# Altium PCB 原理.PcbDoc
Units mil, origin at the board's own origin, x right, y up, seen from the top; angles counter-clockwise.
Board outline 4355 x 2700 mil, 2 copper layers (Top Layer, Bottom Layer); 19 components, 29 nets, 132 pads, 5 vias.
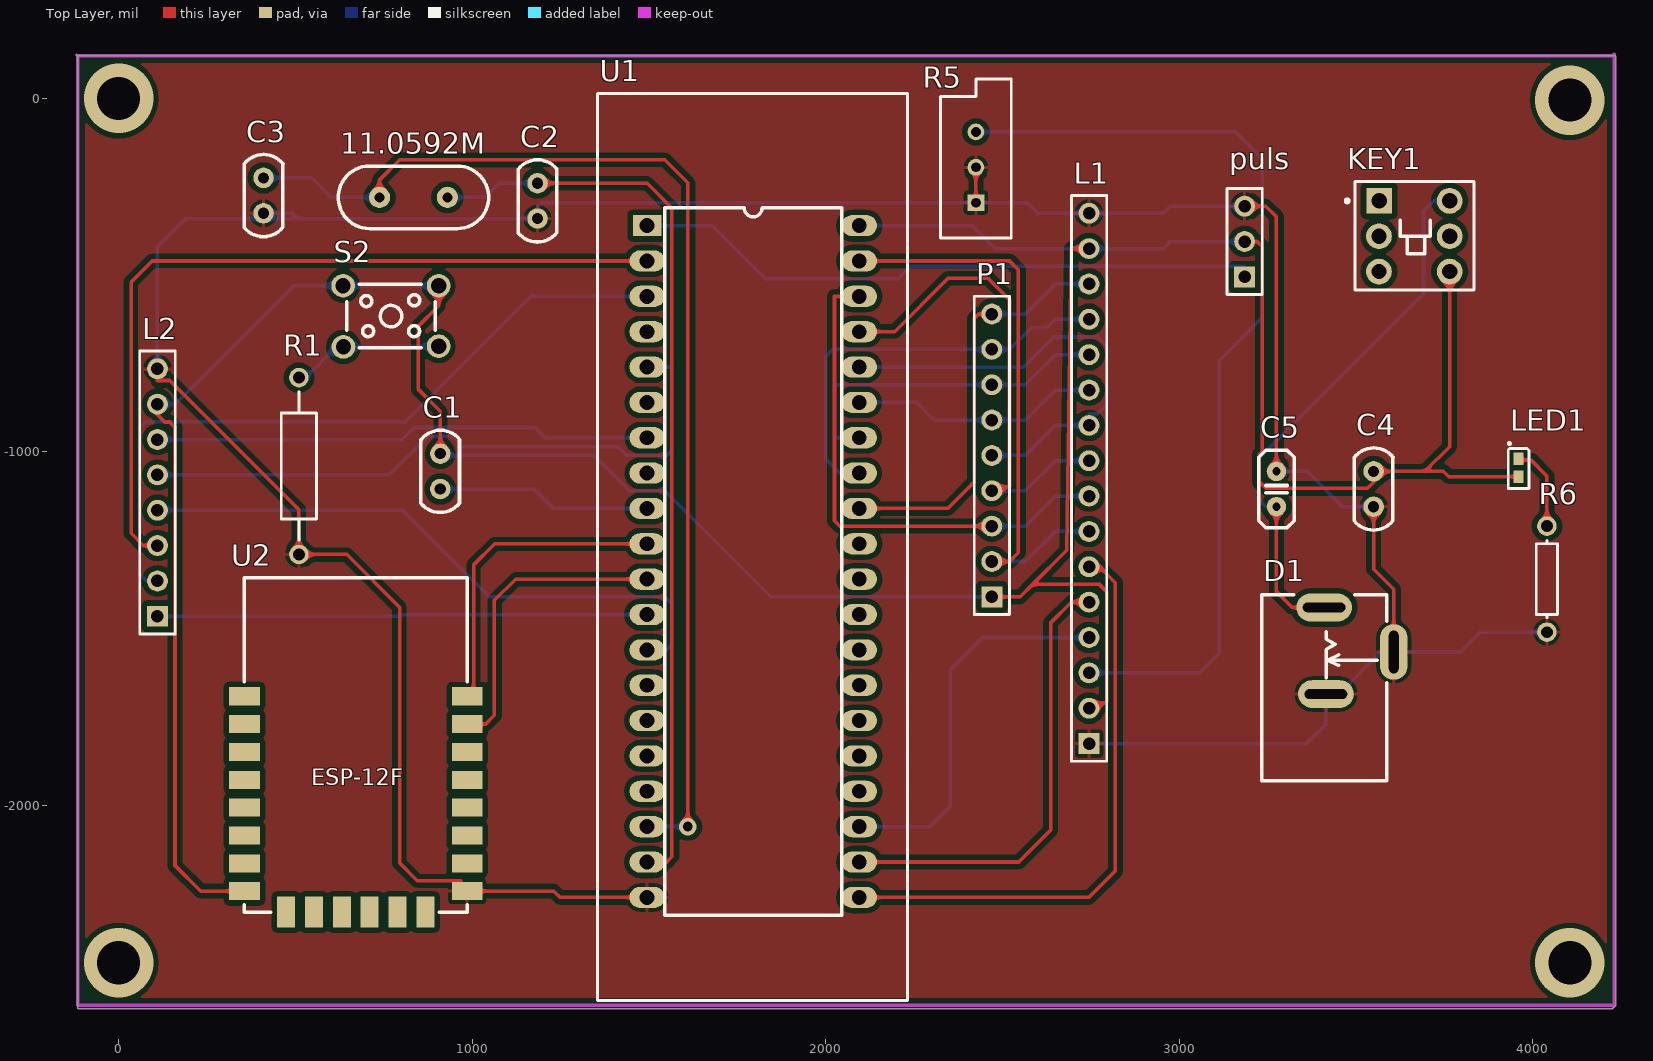
[diagram p0: Top Layer view]
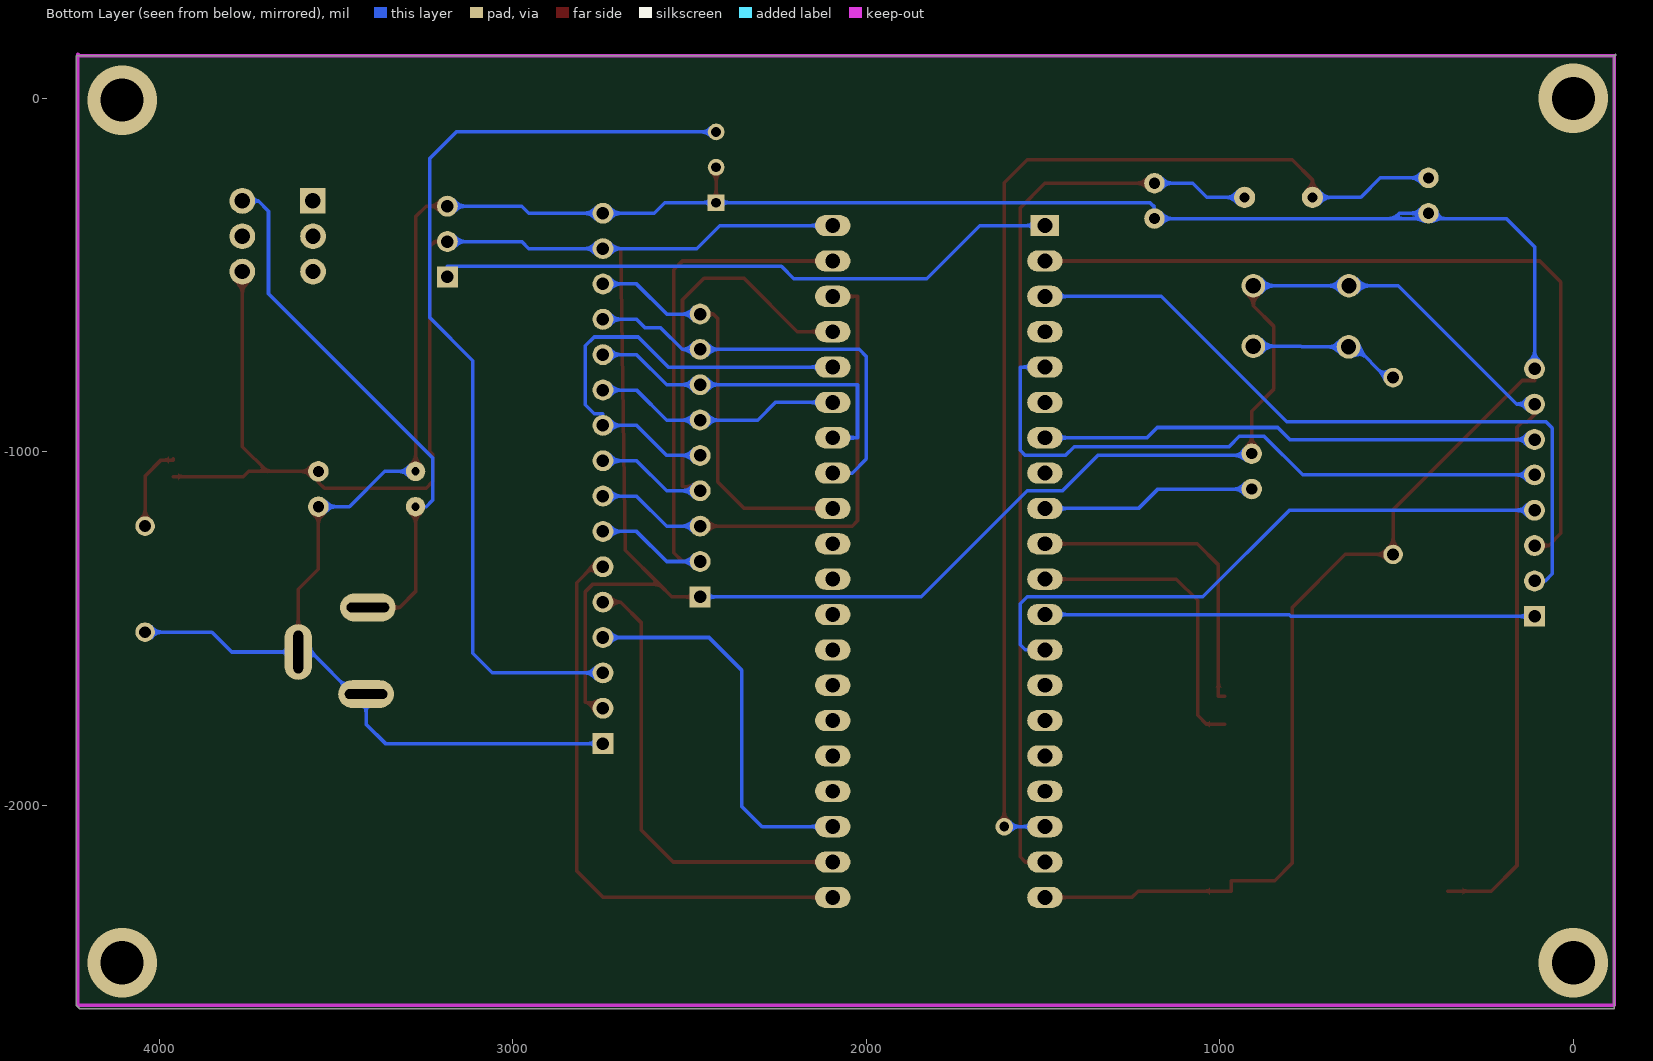
[diagram p1: Bottom Layer view, seen from below]
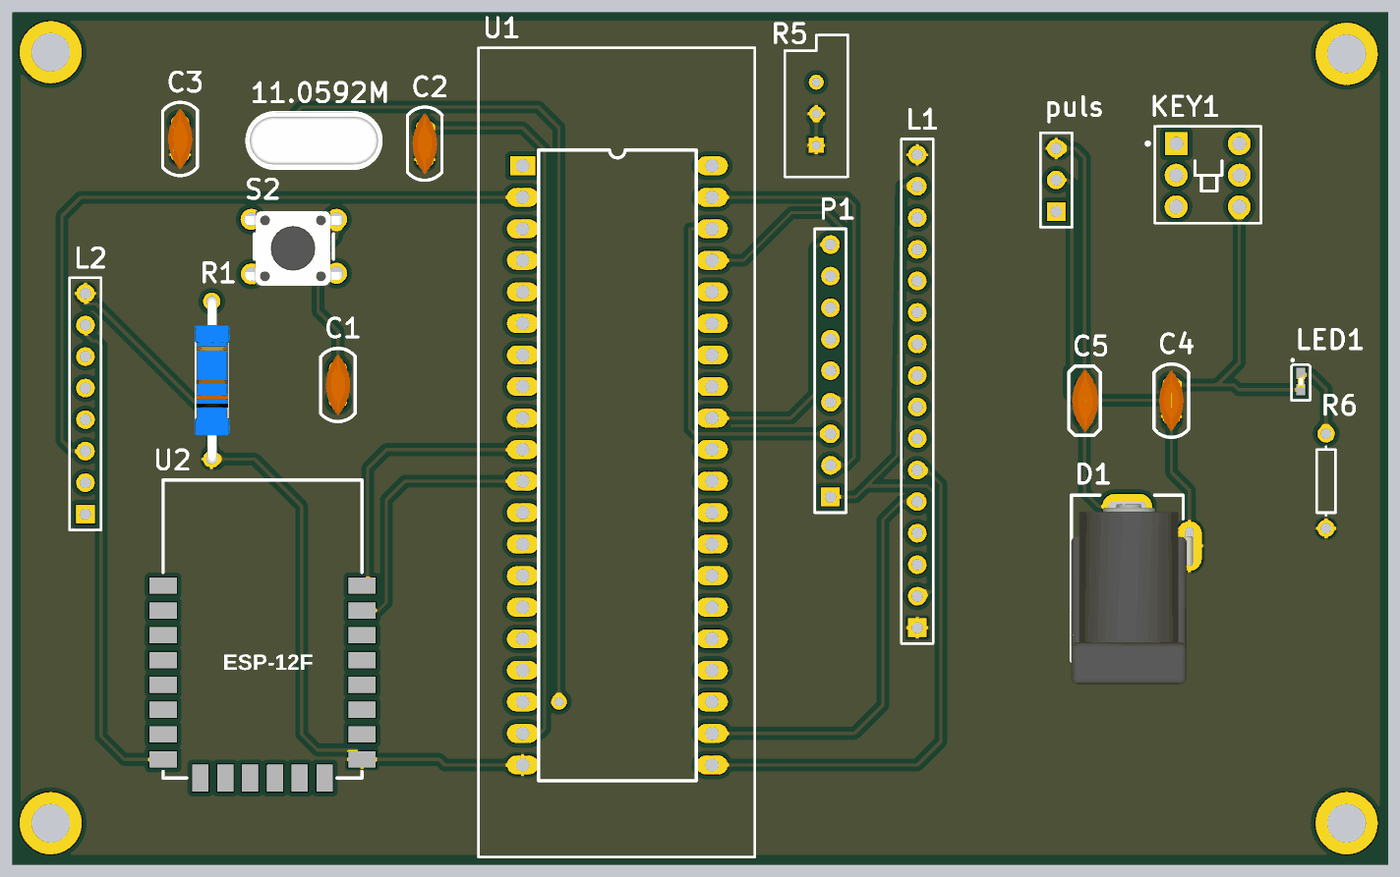
[diagram p2: 3D render of the assembled board from above, using the file's embedded part models]

## Layer stack, top to bottom
Top Solder: solder mask 0.4, Solder Resist, Dk 3.5
Top Layer: signal copper 1.4
Dielectric 1: dielectric 12.6, FR-4, Dk 4.8
Bottom Layer: signal copper 1.4
Bottom Solder: solder mask 0.4, Solder Resist, Dk 3.5

## Board outline
-120,120 4235,120 4235,-2565 4225,-2575 -115,-2575 -115,120 -120,125

## Design rules (kind name [scope] priority, off if disabled: settings)
Clearance [All] p1: gap=15 ignorepadtopadclearanceinfootprint=FALSE
PolygonConnect [All] p1: connectstyle=Relief reliefconductorwidth=10 reliefentries=4 polygonreliefangle="90 Angle" airgapwidth=10
RoutingVias [All] p1: holewidth=28 width=50 viastyle="Through Hole" minholewidth=28 minwidth=50 maxholewidth=28 maxwidth=50
SolderMaskExpansion [All] p1: expansion=4
Width [All] p1: maxlimit=20 minlimit=10 preferedwidth=10
30 further rules are at their usual default settings.

## Components (designator, comment, footprint, x,y, rotation, side; value= is the part's Value field where it differs from the comment)
11.0592M "晶振" XTAL-49/U_N 930,-280 r180 top
C1 "Cap" CAP-0.1 910,-1055 r90 top value=10uF
C2 "" CAP-0.1 1185,-290 r90 top value=30pf
C3 "" CAP-0.1 410,-275 r90 top value=30pF
C4 "Cap" CAP-0.1 3550,-1105 r90 top value=0.1uf/50v
C5 "Cap Pol2" Capacitor-Disk-Middle 3275,-1155 r90 top value=220uF/16V
D1 "Component_1" 接插件_DC端口 3410,-1440 r90 top
KEY1 "Component_2" sw_8.5mm 3565,-390 r0 top
L1 "LCD1602" HDR1X16 2745,-1825 r90 top
L2 "ST7735TFTLCD" HDR1X8 110,-1465 r90 top
LED1 "LED Chip" CLED1005-0402 3960,-1044.41 r90 top
P1 "A103-j" HDR1X9 2470,-1410 r90 top
puls "3.3v" HDR1X3 3185,-505 r90 top
R1 "Resistor 贴片" AXIAL-0.5-R 510,-1040 r90 top value=10k
R5 "RPot" VR5 2425,-195 r90 top value=1K
R6 "Res1" AXIAL-0.3 4040,-1360 r90 top value=510/0.125w
S2 "弹性小按键" BUTTON_6*6 905.37,-701 r180 top
U1 "STC12C5A60S2_DIP" "dip40 - 紧缩座" 1495,-360 r0 top
U2 "ESP-12F" ESP-12F 356,-2301.5 r0 top

## Footprints (in the part's own frame and the unit in brackets; to place one, negate y for a bottom-side part, rotate by r counter-clockwise, add the part's x,y. Pads: shape width x height; smd on the part's side, far side on the other; paste and mask are expansions set on the pad)
AXIAL-0.3 [mm] "Axial Device, Thru-Hole; 2 Leads; 0.3 in Pin Spacing"
  round 1.4 hole 0.85: 1(-3.81,0) 2(3.81,0)
  silkscreen extent -2.77,-0.76 2.77,0.76
AXIAL-0.5-R [mm] "1/2W/1W"
  round 1.4 hole 0.85: 1(-6.35,0) 2(6.35,0)
  silkscreen extent -5.33,-1.27 5.33,1.27, body extent -6.73,-1.46 6.73,1.4, height 3.1
BUTTON_6*6 [mm] "轻触按键"
  round 1.7 hole 1.1: 1(0,0) 1(6.842,0.051) 2(0,-4.343) 2(6.867,-4.343)
  silkscreen extent 0.25,-4.44 6.6,0.13, body extent -0.48,-5.01 7.49,0.99, height 5.26
CAP-0.1 [mil] "瓷片电容"
  round 58 hole 31.5: 1(-50,0) 2(50,0)
  silkscreen extent -116,-55 116,55, body extent -97,-39 97,39, height 226
Capacitor-Disk-Middle [mm]
  round 1.4 hole 0.6: 1(0,0) 2(2.54,0)
  silkscreen extent -1.52,-1.27 4.06,1.27, body extent -1.23,-1.1 3.77,1, height 7
CLED1005-0402 [mm]
  rect 0.9x0.7 smd: 1(-0.65,0) 2(0.65,0)
  silkscreen extent -1.5,-0.75 1.78,0.75, body extent -0.5,-0.25 0.5,0.25, height 0.4
"dip40 - 紧缩座" [mil]
  rect 80x60 hole 42: 1(0,0)
  oval 100x60 hole 42: 2(0,-100) 3(0,-200) 4(0,-300) 5(0,-400) 6(0,-500) 7(0,-600) 8(0,-700) 9(0,-800) 10(0,-900) 11(0,-1000) 12(0,-1100) 13(0,-1200) 14(0,-1300) 15(0,-1400) 16(0,-1500) 17(0,-1600) 18(0,-1700) 19(0,-1800) 20(0,-1900) 21(600,-1900) 22(600,-1800) 23(600,-1700) 24(600,-1600) 25(600,-1500) 26(600,-1400) 27(600,-1300) 28(600,-1200) 29(600,-1100) 30(600,-1000) 31(600,-900) 32(600,-800) 33(600,-700) 34(600,-600) 35(600,-500) 36(600,-400) 37(600,-300) 38(600,-200) 39(600,-100) 40(600,0)
  silkscreen extent -140,-2192 736,374
ESP-12F [mm] "贴片封装，16*24mm"
  rect 2.2x1.3 smd: 1(0,15.5) 2(0,13.5) 3(0,11.5) 4(0,9.5) 5(0,7.5) 6(0,5.5) 7(0,3.5) 8(0,1.5) 15(16.002,1.5) 16(16.002,3.5) 17(16.002,5.5) 18(16.002,7.5) 19(16.002,9.5) 20(16.002,11.5) 21(16.002,13.5) 22(16.002,15.5)
  rect 1.3x2.2 smd: 9(2.996,0) 10(4.996,0) 11(6.996,0) 12(8.996,0) 13(10.996,0) 14(12.996,0)
  silkscreen extent 0,0 16,24
HDR1X3 [mm] "Connector; Header; 3 Position"
  rect 1.5x1.5 hole 0.9: 1(0,0)
  round 1.5 hole 0.9: 2(2.54,0) 3(5.08,0)
  silkscreen extent -1.27,-1.27 6.35,1.27
HDR1X8 [mm] "Connector; Header; 8 Position"
  rect 1.5x1.5 hole 0.9: 1(0,0)
  round 1.5 hole 0.9: 2(2.54,0) 3(5.08,0) 4(7.62,0) 5(10.16,0) 6(12.7,0) 7(15.24,0) 8(17.78,0)
  silkscreen extent -1.27,-1.27 19.05,1.27
HDR1X9 [mm] "Connector; Header; 9 Position"
  rect 1.5x1.5 hole 0.9: 1(0,0)
  round 1.5 hole 0.9: 2(2.54,0) 3(5.08,0) 4(7.62,0) 5(10.16,0) 6(12.7,0) 7(15.24,0) 8(17.78,0) 9(20.32,0)
  silkscreen extent -1.27,-1.27 21.59,1.27
HDR1X16 [mm] "Connector; Header; 16 Position"
  rect 1.5x1.5 hole 0.9: 1(0,0)
  round 1.5 hole 0.9: 2(2.54,0) 3(5.08,0) 4(7.62,0) 5(10.16,0) 6(12.7,0) 7(15.24,0) 8(17.78,0) 9(20.32,0) 10(22.86,0) 11(25.4,0) 12(27.94,0) 13(30.48,0) 14(33.02,0) 15(35.56,0) 16(38.1,0)
  silkscreen extent -1.27,-1.27 39.37,1.27
sw_8.5mm [mm] "自锁开关"
  round 1.85 hole 1.1: 1(0,0) 2(0,-2.54) 4(5.08,0) 5(5.08,2.54) 6(5.08,-2.54)
  rect 1.85x1.85 hole 1.1: 3(0.016,2.544)
  silkscreen extent -2.4,-3.86 6.84,3.94, body extent -0.83,-3.49 6.17,3.51, height 12.5
VR5 [mm] "Thru-Hole; 3 Leads"
  rect 1.2x1.2 hole 0.7: 1(-2.54,0)
  round 1.2 hole 0.7: 2(0,0) 3(2.54,0)
  silkscreen extent -5.08,-2.54 6.35,2.54
XTAL-49/U_N [mil] "高型晶振（未加焊）"
  round 60 hole 28: 1(0,0) 2(192,0)
  silkscreen extent -116,-88 308,89, body extent -117,-88 309,89, height 512
接插件_DC端口 [mm]
  oval 2x4 hole 0.7 slot 3.048 at 90 deg: 1(0,0) 2(-6.223,-0.127)
  oval 4x2 hole 0.7 slot 3.048 at 0 deg: 3(-3.2,-5)
  silkscreen extent -12.45,-4.5 0.9,4.5, body extent -14.33,-5.28 0.17,4.52, height 11.25

## Part data
C1 C4: "Capacitor", LatestRevisionDate=17-Jul-2002, LatestRevisionNote="Re-released for DXP Platform.", PackageDescription="Radial Cap, Thru-Hole; 2 Leads; 0.3 in Pin Spacing", PackageReference=RAD-0.3, Published=8-Jun-2000, Publisher="Altium Limited"
C2 C3: library part Cap, "Capacitor", LatestRevisionDate=17-Jul-2002, LatestRevisionNote="Re-released for DXP Platform.", PackageDescription="Radial Cap, Thru-Hole; 2 Leads; 0.3 in Pin Spacing", PackageReference=RAD-0.3, Published=8-Jun-2000, Publisher="Altium Limited"
C5: "Polarized Capacitor (Axial)", LatestRevisionDate=17-Jul-2002, LatestRevisionNote="Re-released for DXP Platform.", PackageDescription="Polarized Capacitor; 2 Leads", PackageReference=POLAR0.8, Published=8-Jun-2000, Publisher="Altium Limited"
KEY1: library part Component_1
L1: library part "Header 16", "Header, 16-Pin", LatestRevisionDate=17-Jul-2002, LatestRevisionNote="Re-released for DXP Platform.", Publisher="Altium Limited"
LED1: "Typical Chip LED", Published=8-Jun-2000, Publisher="Altium Limited", Revision="July-2002: Re-released for DXP Platform."
puls: library part puls
R5: "Potentiometer", LatestRevisionDate=17-Jul-2002, LatestRevisionNote="Re-released for DXP Platform.", PackageReference=VR5, Published=8-Jun-2000, Publisher="Altium Limited", Set Position=0.5, Sim Note="Enter the Resistance value and the set point into parameter fields."
R6: "Resistor", LatestRevisionDate=17-Jul-2002, LatestRevisionNote="Re-released for DXP Platform.", PackageDescription="Axial Device, Thru-Hole; 2 Leads; 0.3 in Pin Spacing", PackageReference=AXIAL-0.3, Published=8-Jun-2000, Publisher="Altium Limited"
U2: "wifi芯片，ESP8266串口WIFI", 购买参考链接=https://item.taobao.com/item.htm?spm=a1z10.3-c-s.w4002-16248799899.48.e2eb546eHCQD5R&id=45081050416

## Via types
v1: diameter 196.85, hole 122.05, Top Layer to Bottom Layer, 4 vias
v2: diameter 50, hole 28, Top Layer to Bottom Layer, 1 vias

## Nets (pads, with @x,y where several pads share a name; then routed paths per layer and width w, separated by ;. In a path a pad name is that pad's centre, name@x,y a point inside that pad or via, vN(x,y) a via of type N, cw(c..) or ccw(c..) an arc to the next point about the centre after c; other vN are vias at no path point)
28: L1.4 U1.23 | length 1097.1
  Bottom Layer w10: U1.23 2295,-2060 2353,-2002 2353,-1617 2445,-1525 L1.4
32: L1.14 P1.9 U1.32 | length 1184
  Top Layer w10: U1.32 2345,-1160 2420,-1085 2420,-622.5 2432.5,-610 P1.9
  Bottom Layer w10: P1.9 2565,-610 2650,-525 L1.14
33: L1.13 P1.8 U1.33 | length 1190.1
  Bottom Layer w10: U1.33 2040,-1060 2000,-1020 2000,-730 2020,-710 P1.8 2520.72,-710 2582.5,-648.22 2626.78,-648.22 2650,-625 L1.13
34: L1.12 P1.7 U1.34 | length 975.2
  Bottom Layer w10: U1.34 2025,-960 2025,-810 P1.7 2565,-810 2650,-725 L1.12
35: L1.11 P1.6 U1.35 | length 705.9
  Bottom Layer w10: U1.35 2257,-860 2307,-910 P1.6 2565,-910 2650,-825 L1.11
36: L1.10 P1.5 U1.36 | length 1316.1
  Bottom Layer w10: U1.36 2560,-760 2645,-675 2770,-675 2795,-700 2795,-867 2770,-892 2745,-892 L1.10 2650,-925 2565,-1010 P1.5
37: L1.9 P1.4 U1.37 | length 1402.1
  Top Layer w10: U1.37 2195,-660 2346,-509 2459,-509 2520,-570 2520,-1097.5 P1.4
  Bottom Layer w10: P1.4 2565,-1110 2650,-1025 L1.9
38: L1.8 P1.3 U1.38 | length 1466.4
  Top Layer w10: U1.38 2025,-560 2025,-1195 2040,-1210 P1.3
  Bottom Layer w10: P1.3 2565,-1210 2650,-1125 L1.8
39: L1.7 P1.2 U1.39 | length 1655.9
  Top Layer w10: U1.39 2520,-460 2545,-485 2545,-1285 2520,-1310 P1.2
  Bottom Layer w10: P1.2 2565,-1310 2650,-1225 L1.7
GND: C2.1 C3.1 C4.1 C5.2 D1.2 D1.3 L1.1 L1.16 L2.8 puls.3 R1.1 R5.1 R5.2 R6.1 U1.20 U2.15 | length 9303.1
  Top Layer w10: L2.8 110,-798 145,-798 510,-1163 R1.1 645,-1290 795,-1440 795,-2163 845,-2213 968,-2213 968,-2242.44 U2.15 1231,-2242.44 1248.56,-2260 U1.20 ; R5.1 R5.2 ; puls.3 3245,-305 3275,-335 C5.2 ; C4.1 3550,-1332.15 3606.85,-1389 D1.3
  Bottom Layer w10: L2.8 110,-420 190,-340 508,-340 ; C3.1 493,-325 508,-340 ; L1.1 3360,-1825 3415,-1770 D1.2 3451,-1685 3570.02,-1565.98 D1.3 3795,-1565.98 3850.98,-1510 R6.1 ; puls.3 2975,-305 2955,-325 L1.16 2600,-325 2570,-295 R5.1 1197.5,-295 1185,-307.5 C2.1 508,-340 ; C5.2 3362,-1055 3462,-1155 C4.1
NetC1_1: C1.1 U1.9 | length 607.8
  Bottom Layer w10: C1.1 1175,-1105 1230,-1160 U1.9
NetL1_3: L1.3 R5.3 | length 2682.4
  Bottom Layer w10: R5.3 3160,-95 3235,-170 3235,-620 3113,-742 3113,-1570 3058,-1625 L1.3
NetL2_1: L2.1 U1.12 | length 1387.1
  Bottom Layer w10: L2.1 800,-1465 805,-1460 U1.12
NetL2_2: L2.2 U1.3 | length 2060.1
  Bottom Layer w10: L2.2 80,-1365 60,-1345 60,-932.5 77.5,-915 811,-915 1166,-560 U1.3
NetL2_3: L2.3 U1.2 | length 2284
  Top Layer w10: L2.3 70,-1265 35.47,-1230.47 35.47,-519.53 95,-460 U1.2
NetL2_4: L2.4 U1.13 | length 1756
  Bottom Layer w10: L2.4 803,-1165 1048,-1410 1545,-1410 1565,-1430 1565,-1545 1550,-1560 U1.13
NetL2_5: L2.5 U1.5 | length 1833.7
  Bottom Layer w10: L2.5 766,-1065 875,-956 945,-956 974,-985 1412,-985 1437,-1010 1550,-1010 1565,-995 1565,-760 U1.5
NetL2_6: L2.6 U1.7 | length 1411.1
  Bottom Layer w10: L2.6 802,-965 836,-931 1177,-931 1206,-960 U1.7
NetLED1_2: LED1.2 R6.2 | length 244.8
  Top Layer w10: LED1.2 3960,-1023 3995,-1023 4040,-1068 R6.2
Netpuls_1: puls.1 U1.1 | length 1796.6
  Bottom Layer w10: U1.1 1679,-360 1829,-510 2205,-510 2240,-475 3185,-475 puls.1
NetR1_2: R1.2 S2.1 | length 432.2
  Bottom Layer w10: R1.2 529,-790 616,-703 636,-703 769,-703 771,-701 S2.1@905.37,-701
NetU1_10: U1.10 U2.22 | length 905.1
  Top Layer w10: U2.22 1004,-1691.26 1004,-1320 1064,-1260 U1.10
NetU1_11: U1.11 U2.21 | length 869.2
  Top Layer w10: U2.21 1038,-1770 1063,-1745 1063,-1420 1123,-1360 U1.11
P21: L1.5 U1.22 | length 1297.7
  Top Layer w10: U1.22 2546,-2160 2636,-2070 2636,-1484 2695,-1425 L1.5
P22: L1.6 U1.21 | length 1664
  Top Layer w10: U1.21 2745,-2260 2819.53,-2185.47 2819.53,-1370 2774.53,-1325 L1.6
TXAL1: 11.0592M.1 C2.2 U1.19 | length 2591.8
  Top Layer w10: C2.2 1495,-240 1565,-310 1565,-2145 1550,-2160 U1.19
  Bottom Layer w10: 11.0592M.1 1037,-280 1077,-240 C2.2
TXAL2: 11.0592M.2 C3.2 U1.18 | length 3258.3
  Top Layer w10: 11.0592M.2 738,-231 795,-174 1545,-174 1610,-239 v2(1610,-2060)
  Bottom Layer w10: C3.2 546,-225 601,-280 11.0592M.2 ; U1.18 v2(1610,-2060)
VCC: C1.2 C4.2 KEY1.6 L1.2 L1.15 L2.7 LED1.1 P1.1 puls.2 S2.2 U1.40 U2.8 | length 9731.4
  Top Layer w10: L2.7 110,-895 130.47,-915.47 145,-915.47 159.53,-930 159.53,-2170 231.97,-2242.44 U2.8 ; S2.2@905.37,-530 905.37,-587 847,-645.37 847,-822 910,-885 C1.2 ; P1.1 2550,-1410 2585,-1375 ; L1.2 2794.53,-1707.5 2794.53,-1395 2774.53,-1375 2585,-1375 ; L1.15 2695,-425 2682,-1278 2585,-1375 ; puls.2 3220,-405 3235,-420 3235,-999 3227,-1007 3227,-1085 3245,-1103 3532.5,-1103 3550,-1085.5 C4.2 3695,-1055 ; KEY1.6 3765,-985 3695,-1055 ; LED1.1 3762,-1070 3747,-1055 3695,-1055
  Bottom Layer w10: L2.7 160,-865 495,-530 635,-530 S2.2@905.37,-530 ; C1.2 910,-1010 1345,-1010 1445,-1110 1545,-1110 1845,-1410 P1.1 ; U1.40 2414.76,-360 2479.76,-425 L1.15 2955,-425 2975,-405 puls.2
VDD: C5.1 D1.1 KEY1.5 | length 1545.3
  Top Layer w10: C5.1 3275,-1395 3320,-1440 D1.1
  Bottom Layer w10: C5.1 3245,-1155 3227,-1137 3227,-1017 3691,-553 3691,-319 3720,-290 KEY1.5
pads on no net: KEY1.1 KEY1.2 KEY1.3 KEY1.4 U1.4 U1.6 U1.8 U1.14 U1.15 U1.16 U1.17 U1.24 U1.25 U1.26 U1.27 U1.28 U1.29 U1.30 U1.31 U2.1 U2.2 U2.3 U2.4 U2.5 U2.6 U2.7 U2.9 U2.10 U2.11 U2.12 U2.13 U2.14 U2.16 U2.17 U2.18 U2.19 U2.20
copper on no net:
  other v1: 0,-2445 4105,-2445 4105,-5 0,0

## Polygon pours and split planes (outlines as drawn)
GND on Top Layer "GND_L01_P018" (solid, pour order 18): -115,120 4225,120 4230,115 4230,-2565 -115,-2565

## Keep-outs
Keep-Out Layer:
  lines w10: -115,-2565 4230,-2565 4230,125 4225,120 -115,120 -115,-2565